# Altium PCB IrrigationStation_V1R1.PcbDoc
Units mm, origin at the board's own origin, x right, y up, seen from the top; angles counter-clockwise.
Board outline 83.82 x 59.51 mm, 2 copper layers (Top Layer, Bottom Layer); 18 components, 16 nets, 71 pads, 0 vias.
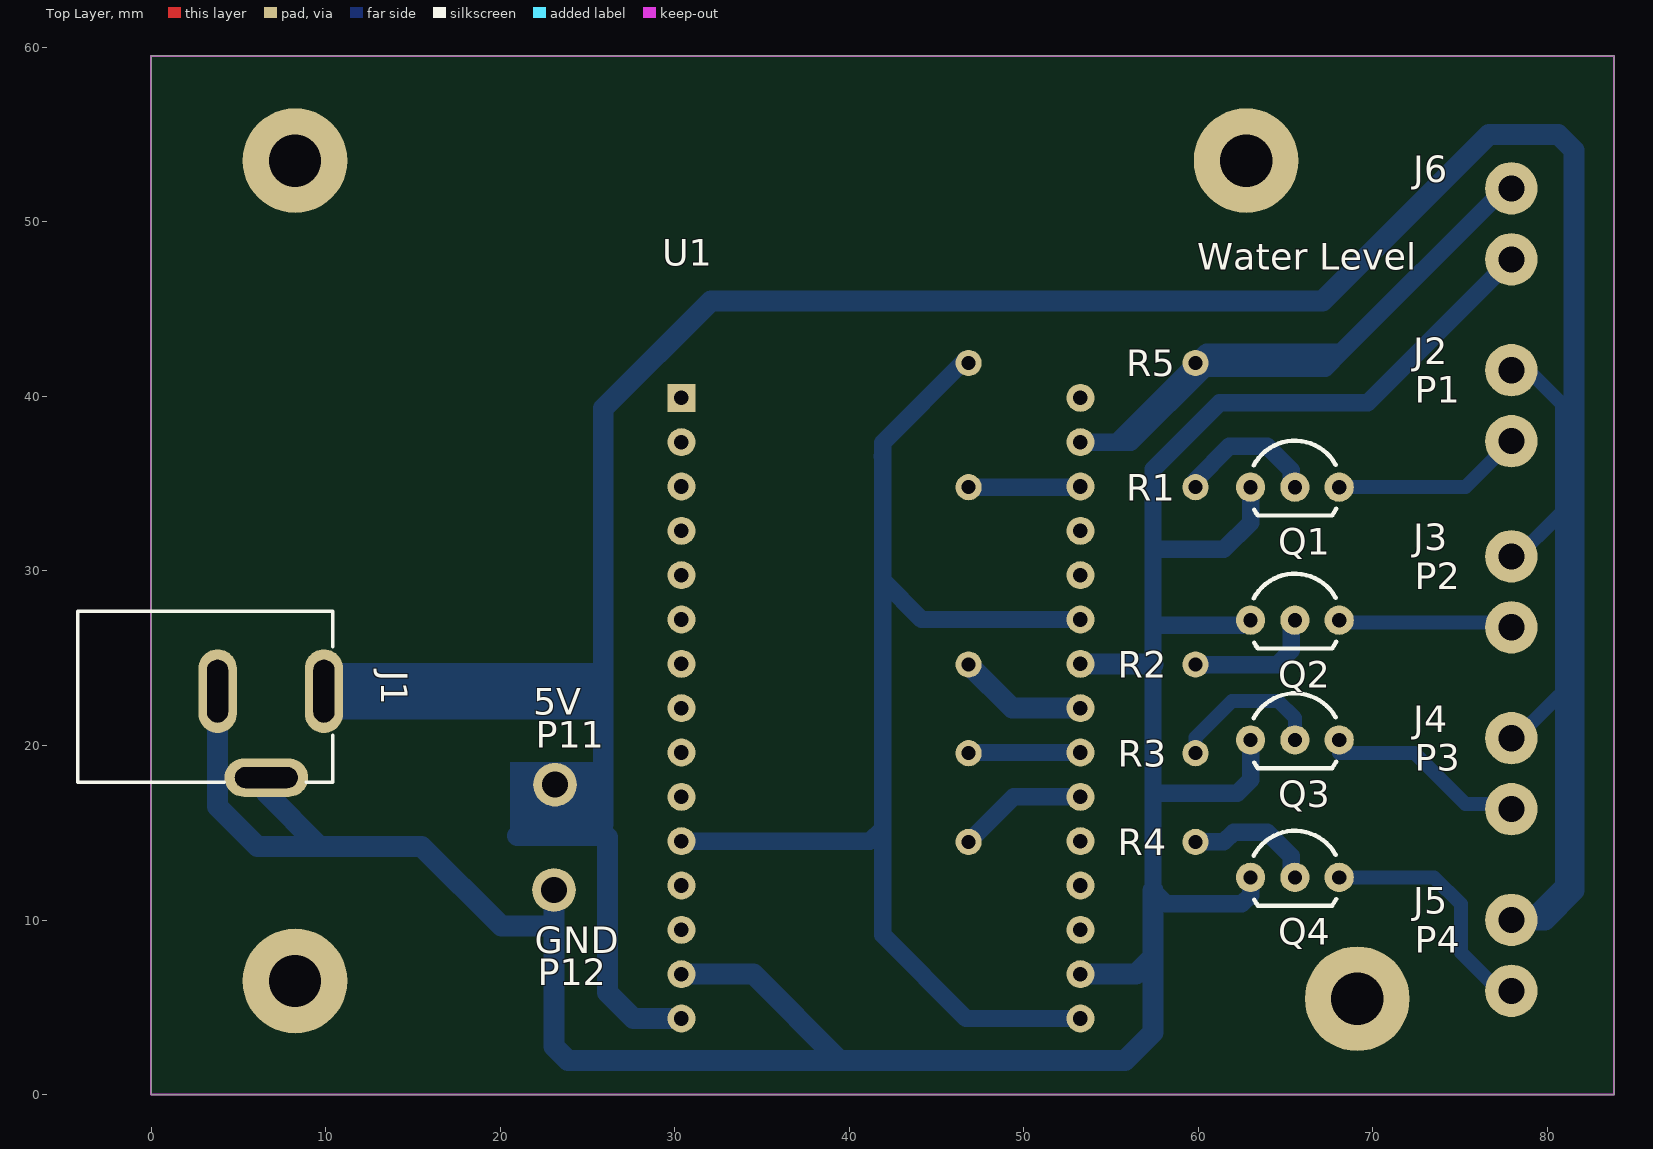
[diagram p0: Top Layer view]
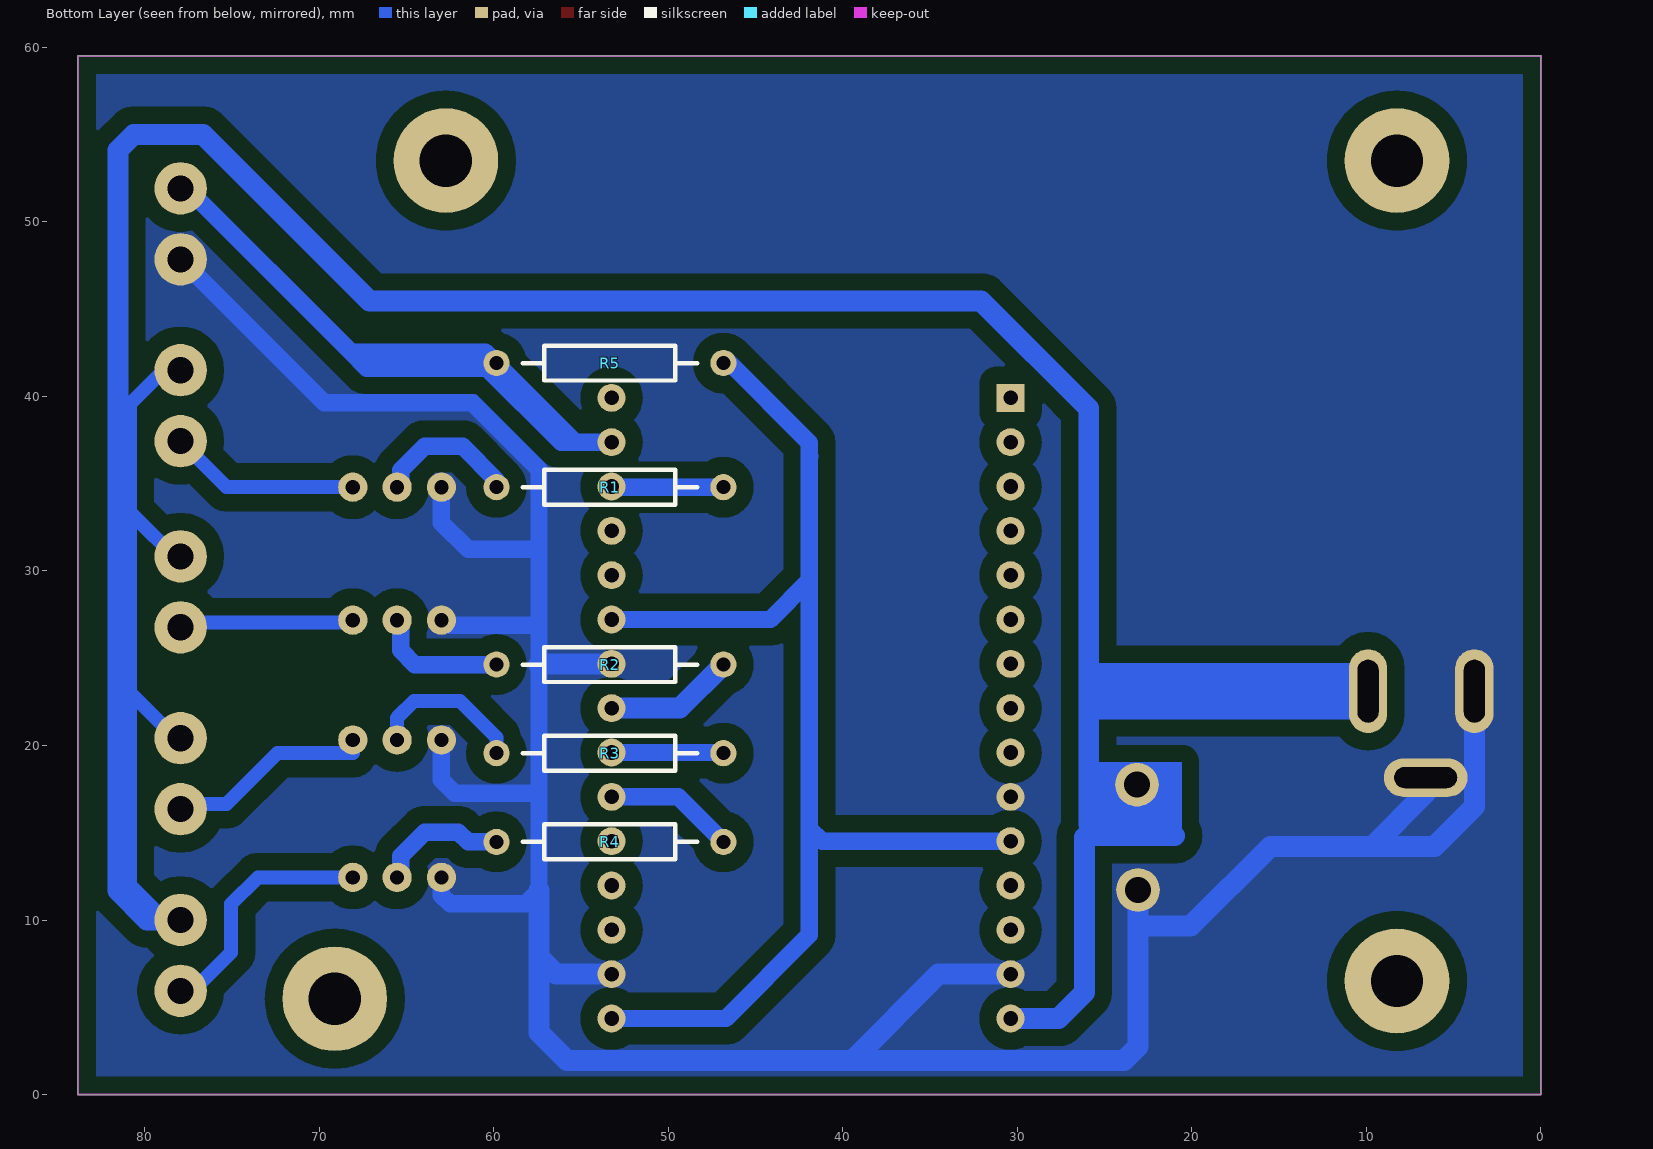
[diagram p1: Bottom Layer view, seen from below]
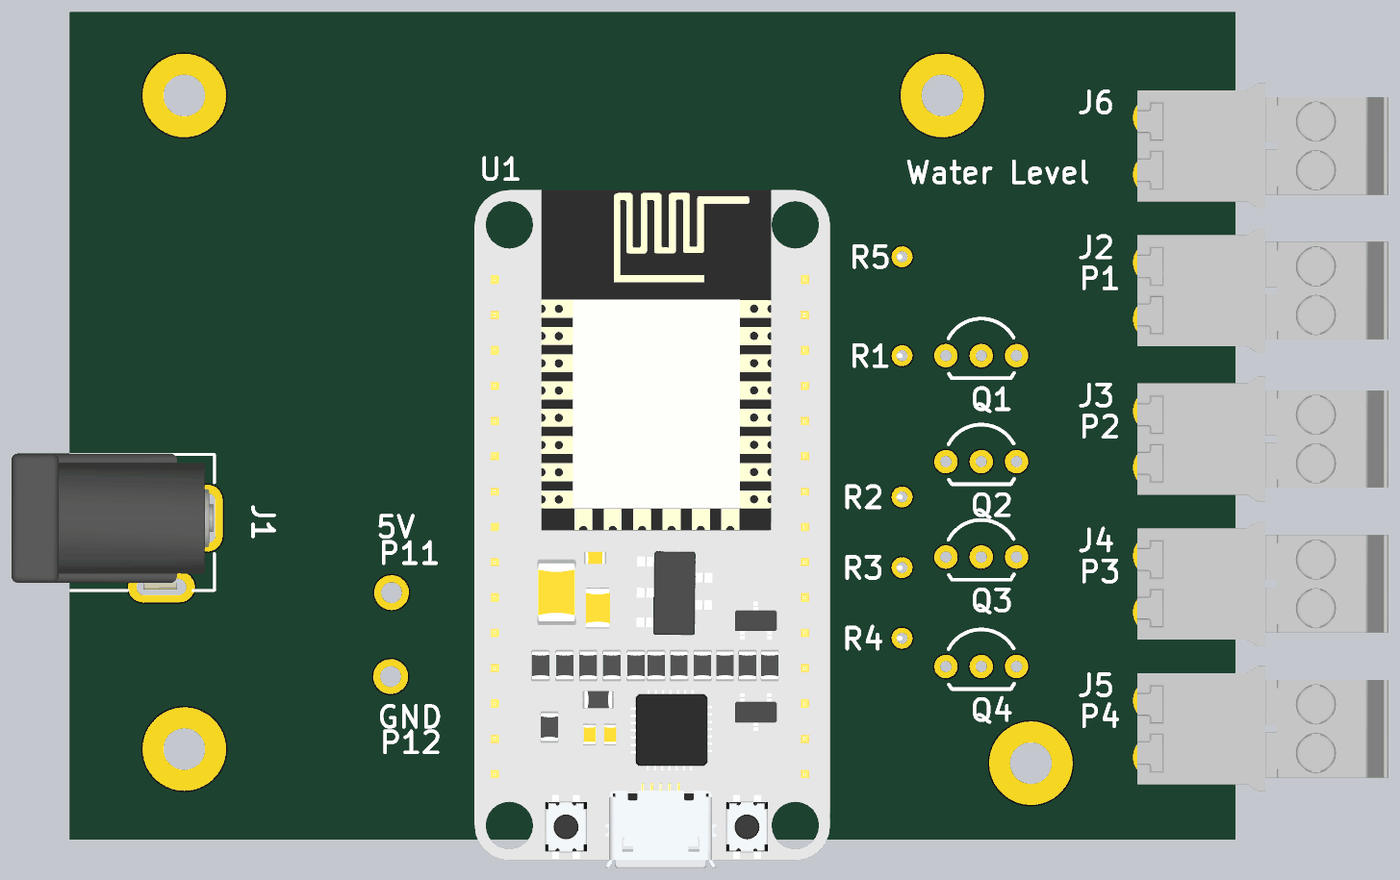
[diagram p2: 3D render of the assembled board from above, using the file's embedded part models]
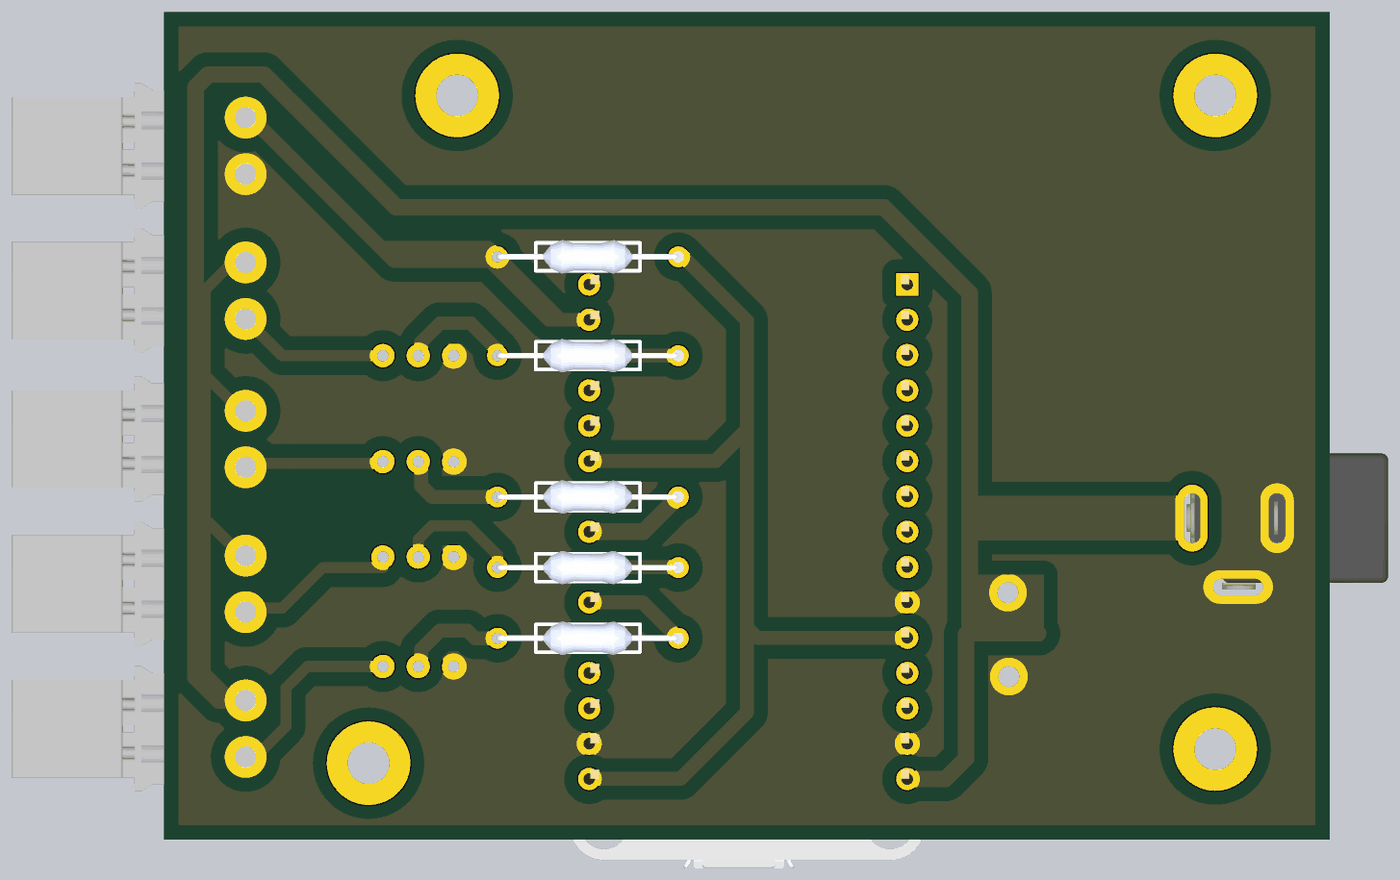
[diagram p3: 3D render of the assembled board from below, using the file's embedded part models]

## Layer stack, top to bottom
Top Solder: solder mask 0.0102, Solder Resist, Dk 3.5
Top Layer: signal copper 0.0356
Dielectric 1: dielectric 0.32, FR-4, Dk 4.8
Bottom Layer: signal copper 0.0356
Bottom Solder: solder mask 0.0102, Solder Resist, Dk 3.5

## Board outline
0,0 83.82,0 83.82,59.508 0,59.508

## Design rules (kind name [scope] priority, off if disabled: settings)
Clearance [All] p1: gap=1 ignorepadtopadclearanceinfootprint=TRUE except(0: Arc-Hole Track-Hole SMDPad-Hole THPad-Hole Via-Hole Fill-Hole Poly-Hole Region-Hole Text-Hole)
HoleSize [All] p1: absolutevalues=TRUE maxlimit=4 minlimit=0.025 maxpercent=80.000 minpercent=20.000
PolygonConnect [All] p1: connectstyle=Direct reliefconductorwidth=0.254 reliefentries=4 polygonreliefangle="45 Angle" airgapwidth=0.254
RoutingLayers [All] p1: top layer_v5=FALSE bottom layer_v5=TRUE
RoutingVias [All] p1: holewidth=0.711 width=1.27 viastyle="Through Hole" minholewidth=0.711 minwidth=1.27 maxholewidth=0.711 maxwidth=1.27
SolderMaskExpansion [All] p1: expansion=0.102
Width [All] p1: maxlimit=1.2 minlimit=0.8 preferedwidth=0.8
28 further rules are at their usual default settings.

## Components (designator, comment, footprint, x,y, rotation, side; value= is the part's Value field where it differs from the comment)
J1 "DC Jack" "DC JACK - KLDHCX" 6.477,22.86 r0 top
J2 "P1" "Terminal Block,2 Pos, 4mm" 77.938,39.47 r90 top
J3 "P2" "Terminal Block,2 Pos, 4mm" 77.938,28.802 r90 top
J4 "P3" "Terminal Block,2 Pos, 4mm" 77.938,18.388 r90 top
J5 "P4" "Terminal Block,2 Pos, 4mm" 77.938,7.974 r90 top
J6 "Water Level" "Terminal Block,2 Pos, 4mm" 77.938,49.884 r90 top
P11 "5V" "PIN - TH 1.5MM" 23.146,17.758 r0 top
P12 "GND" "PIN - TH 1.5MM" 23.082,11.724 r90 top
Q1 "P2N2222A" TO92 65.532,34.798 r0 top
Q2 "P2N2222A" TO92 65.532,27.178 r0 top
Q3 "P2N2222A" TO92 65.532,20.32 r0 top
Q4 "P2N2222A" TO92 65.532,12.446 r0 top
R1 "500" "RESISTOR - TH - 12MM" 53.34,34.798 r0 bottom
R2 "500" "RESISTOR - TH - 12MM" 53.34,24.638 r0 bottom
R3 "500" "RESISTOR - TH - 12MM" 53.34,19.558 r0 bottom
R4 "500" "RESISTOR - TH - 12MM" 53.34,14.478 r0 bottom
R5 "10K" "RESISTOR - TH - 12MM" 53.34,41.91 r180 bottom
U1 "NodeMcu" DIP2286W64P254L4826H735Q30N 41.815,22.138 r0 top

## Footprints (in the part's own frame and the unit in brackets; to place one, negate y for a bottom-side part, rotate by r counter-clockwise, add the part's x,y. Pads: shape width x height; smd on the part's side, far side on the other; paste and mask are expansions set on the pad)
"DC JACK - KLDHCX" [mm]
  oval 2.2x4.8 hole 1.2 slot 3.6 at 90 deg: 1(3.429,0.254) 2(-2.667,0.254)
  oval 4.8x2.2 hole 1.2 slot 3.6 at 0 deg: 3(0.127,-4.699)
  silkscreen extent -10.67,-4.95 3.94,4.83, body extent -10.65,-4.9 3.85,4.9, height 11
DIP2286W64P254L4826H735Q30N [mm]
  rect 1.6x1.6 hole 0.835: 1(-11.43,17.78)
  round 1.6 hole 0.835: 2(-11.43,15.24) 3(-11.43,12.7) 4(-11.43,10.16) 5(-11.43,7.62) 6(-11.43,5.08) 7(-11.43,2.54) 8(-11.43,0) 9(-11.43,-2.54) 10(-11.43,-5.08) 11(-11.43,-7.62) 12(-11.43,-10.16) 13(-11.43,-12.7) 14(-11.43,-15.24) 15(-11.43,-17.78) 16(11.43,-17.78) 17(11.43,-15.24) 18(11.43,-12.7) 19(11.43,-10.16) 20(11.43,-7.62) 21(11.43,-5.08) 22(11.43,-2.54) 23(11.43,0) 24(11.43,2.54) 25(11.43,5.08) 26(11.43,7.62) 27(11.43,10.16) 28(11.43,12.7) 29(11.43,15.24) 30(11.43,17.78)
  body extent -12.7,-24.25 12.85,24.57, height 12.85
"PIN - TH 1.5MM" [mm] "Through-hole pin - 1.5mm"
  round 2.5 hole 1.5: 1(0,0)
"RESISTOR - TH - 12MM" [mm] "Through-hole resistor 12mm/0.8mm"
  round 1.5 hole 0.8: 1(-6.5,0) 2(6.5,0)
  silkscreen extent -5,-1 5,1, body extent -6.55,-1.2 6.55,1.2, height 3.9
"Terminal Block,2 Pos, 4mm" [mm] "Terminal Block,2 Pos, 4mm"
  round 3 hole 1.5 paste+0 mask+0: 1(2.032,0) 2(-2.032,0)
  body extent -4.5,-16.85 4.5,1.2, height 8.8
TO92 [mil]
  round 66 hole 32: 1(-100,0) 2(0,0) 3(100,0)
  silkscreen extent -93,-64 93,105

## Part data
J1: Manufacturer=Kycon, Manufacturer Part Number=KLDHCX-0202-AC-1, Supplier Part Number 1=806-KLDHCX-0202-AC-1, Pricing 1="1=1.01, 10=0.804, 100=0.769, 250=0.7, 500=0.629, 1000=0.56 (USD)", Stock 1=495, Supplier 1=Mouser
J2 J3 J4 J5 J6: library part "TERM BLOCK PLUG 2POS", "2 Position Terminal Block Plug, Female Sockets 180° Free Hanging (In-Line)"
P11 P12: library part Pin, "Single Pin"
Q1 Q2 Q3 Q4: "Transitor lưỡng cực _BJT_ NPN 40V 600mA 300 MHz 625mW qua lỗ TO-92-3", Package="TO-92 ON Semiconductor", Availability=Unavailable, MF="ON Semiconductor", MP=P2N2222A, Price=None, SnapEDA_Link=https://www.snapeda.com/parts/P2N2222A/ON%20Semiconductor/view-part/13920/?ref=snap
R1 R2 R3 R4 R5: library part Resistor, "Generic Resistor"
U1: "Undefined or Miscellaneous", Arrow Part Number=113990105, Manufacturer_Name="Seeed Studio", Mouser Part Number=713-113990105, Arrow Price/Stock=https://www.arrow.com/en/products/113990105/seeed-technology-limited, Datasheet Link=https://github.com/nodemcu/nodemcu-devkit-v1.0/blob/master/NODEMCU_DEVKIT_V1.0.PDF, Height=7.35mm, Manufacturer_Part_Number=113990105, Mouser Price/Stock=https://www.mouser.co.uk/ProductDetail/Seeed-Studio/113990105?qs=SElPoaY2y5KMx8k1roAIKw%3D%3D

## Free pads (board coordinates)
  round 6 hole 3: FX(8.25,6.508) FX(8.25,53.508) FX(62.738,53.508) FX(69.102,5.492)

## Nets (pads, with @x,y where several pads share a name; then routed paths per layer and width w, separated by ;. In a path a pad name is that pad's centre, name@x,y a point inside that pad or via, vN(x,y) a via of type N, cw(c..) or ccw(c..) an arc to the next point about the centre after c; other vN are vias at no path point)
3.3V: R5.2 U1.11 U1.16 U1.25 | length 72.3
  Bottom Layer w1: U1.11 41.188,14.518 41.91,15.24 ; 41.895,36.561 41.91,36.546 ; R5.2@46.661,42.089 41.91,37.338 41.91,36.546 ; U1.16 46.696,4.358 41.91,9.144 41.91,15.24 ; U1.25 44.156,27.218 41.91,29.464 ; 41.91,15.24 41.91,29.464 ; 41.91,29.464 41.91,36.546
5V: J1.1 J2.1 J3.1 J4.1 J5.1 P11.1 U1.15 | length 251.6
  Bottom Layer w0.8: J4.1@77.938,20.138 80.603,22.803 ; J3.1@77.938,30.552 78.013,30.552 80.768,33.306 ; J2.1@77.938,41.22 79.176,41.22 80.838,39.558 80.838,12.004 J5.1@78.84,10.006
  Bottom Layer w1.2: P11.1 25.659,15.245 ; 25.908,24.384 25.908,39.304 32.07,45.466 67.104,45.466 76.654,55.016 80.62,55.016 81.534,54.102 81.534,11.684 79.856,10.006 78.84,10.006 J5.1 ; U1.15 27.646,4.358 26.162,5.842 26.162,14.742 26.076,14.828 ; J1.1 10.922,22.098 25.908,22.098 ; J1.1 10.922,24.13 25.908,24.13 25.908,23.114 ; J1.1 25.908,23.114 ; 25.659,15.245 25.908,15.494 25.908,22.098 ; 25.659,15.245 25.337,14.923 21.082,14.923 20.987,14.828 26.076,14.828 ; 25.659,15.245 26.076,14.828 ; 25.908,22.098 25.908,23.114
GND: J1.2 J1.3 J6.2 P12.1 Q1.1 Q2.1 Q3.1 Q4.1 U1.10 U1.14 U1.17 U1.24 | length 184
  Bottom Layer w1: Q2.1@62.52,26.888 57.44,26.888 57.404,26.924 ; Q4.1@62.992,12.7 Q4.1 62.992,11.43 62.484,10.922 58.166,10.922 57.404,11.684 57.404,17.272 ; Q3.1@62.992,19.558 62.992,18.034 62.23,17.272 57.404,17.272 ; Q1.1 62.992,32.766 61.468,31.242 57.404,31.242 ; J6.2 69.71,39.624 61.214,39.624 57.404,35.814 57.404,31.242 ; 57.404,17.272 57.404,24.638 57.404,26.924 ; 57.404,26.924 57.404,31.242
  Bottom Layer w1.2: J1.2 3.81,16.51 6.096,14.224 9.652,14.224 ; J1.3 6.604,17.272 9.652,14.224 ; P12.1 23.082,9.652 ; U1.14 34.504,6.898 39.444,1.958 ; U1.17 56.428,6.898 57.404,7.874 ; U1.24 57.364,24.678 57.404,24.638 ; 57.404,11.684 57.404,7.874 ; 9.652,14.224 15.494,14.224 20.066,9.652 23.082,9.652 ; 23.082,9.652 23.082,2.752 23.876,1.958 39.444,1.958 ; 39.444,1.958 55.806,1.958 57.404,3.556 57.404,7.874
P1-control: R1.1 U1.28 | length 6.4
  Bottom Layer w1: R1.1 53.205,34.798 U1.28
P1-SSR: J2.2 Q1.3 | length 11
  Bottom Layer w0.8: Q1.3 75.298,34.798 J2.2
P1_control: Q1.2 R1.2 | length 8.3
  Bottom Layer w1: R1.2 59.84,35.202 61.774,37.136 63.961,37.136 65.33,35.767 65.33,34.953 65.377,34.953 Q1.2
P2-control: R2.1 U1.23 | length 7.4
  Bottom Layer w1.2: R2.1 49.34,22.138 U1.23
P2-SSR: J3.2 Q2.3 | length 9.2
  Bottom Layer w0.8: Q2.3@68.708,27.052 J3.2@77.938,27.052
P2_control: Q2.2 R2.2 | length 7.6
  Bottom Layer w1: R2.2 64.521,24.638 65.33,25.447 Q2.2@65.33,27.178
P3-control: R3.1 U1.22 | length 6.5
  Bottom Layer w1: R3.1 46.88,19.598 U1.22 U1.22@53.205,19.558
P3-SSR: J4.2 Q3.3 | length 11.1
  Bottom Layer w0.8: Q3.3@68.072,19.558 72.39,19.558 75.31,16.638 J4.2@77.938,16.638
P3_control: Q3.2 R3.2 | length 9.1
  Bottom Layer w0.8: R3.2 59.84,20.47 61.928,22.558 64.564,22.558 65.532,21.59 65.532,20.787 Q3.2@65.23,20.485
P4-control: R4.1 U1.21 | length 7.5
  Bottom Layer w1: R4.1 49.42,17.058 U1.21
P4-SSR: J5.2 Q4.3 | length 14.1
  Bottom Layer w0.8: Q4.3 73.514,12.446 75.038,10.922 75.038,8.151 76.965,6.224 J5.2@77.938,6.224
P4_control: Q4.2 R4.2 | length 7.1
  Bottom Layer w1: R4.2 61.463,14.478 62.023,15.038 63.961,15.038 65.33,13.669 Q4.2@65.33,12.902
WaterLevel: J6.1 R5.1 U1.29 | length 45.7
  Bottom Layer w1: U1.29 55.372,37.378 ; J6.1 77.57,51.916 68.199,42.545 ; 55.372,37.378 55.372,37.442 R5.1 60.475,42.545 68.199,42.545 ; 55.372,37.378 56.14,37.378 60.386,41.624 67.278,41.624 68.199,42.545
pads on no net: U1.1 U1.2 U1.3 U1.4 U1.5 U1.6 U1.7 U1.8 U1.9 U1.12 U1.13 U1.18 U1.19 U1.20 U1.26 U1.27 U1.30

## Polygon pours and split planes (outlines as drawn)
GND on Bottom Layer "Bottom Layer-GND" (solid, pour order 2): 0,0 0,59.508 83.82,59.508 83.82,0

## Keep-outs
Keep-Out Layer:
  the board outline again, w0.1

## Other copper
Bottom Layer:
  rectangle net 5V: 20.574,14.478 25.4,19.05